# Altium PCB smart-watch.PcbDoc (part 1 of 2)
Units mm, origin at the board's own origin, x right, y up, seen from the top; angles counter-clockwise.
Board outline 30.1 x 34.67 mm, 2 copper layers (Top Layer, Bottom Layer); 78 components, 120 nets, 977 pads, 0 vias.
Unrouted connection lines stored in the file: 551.
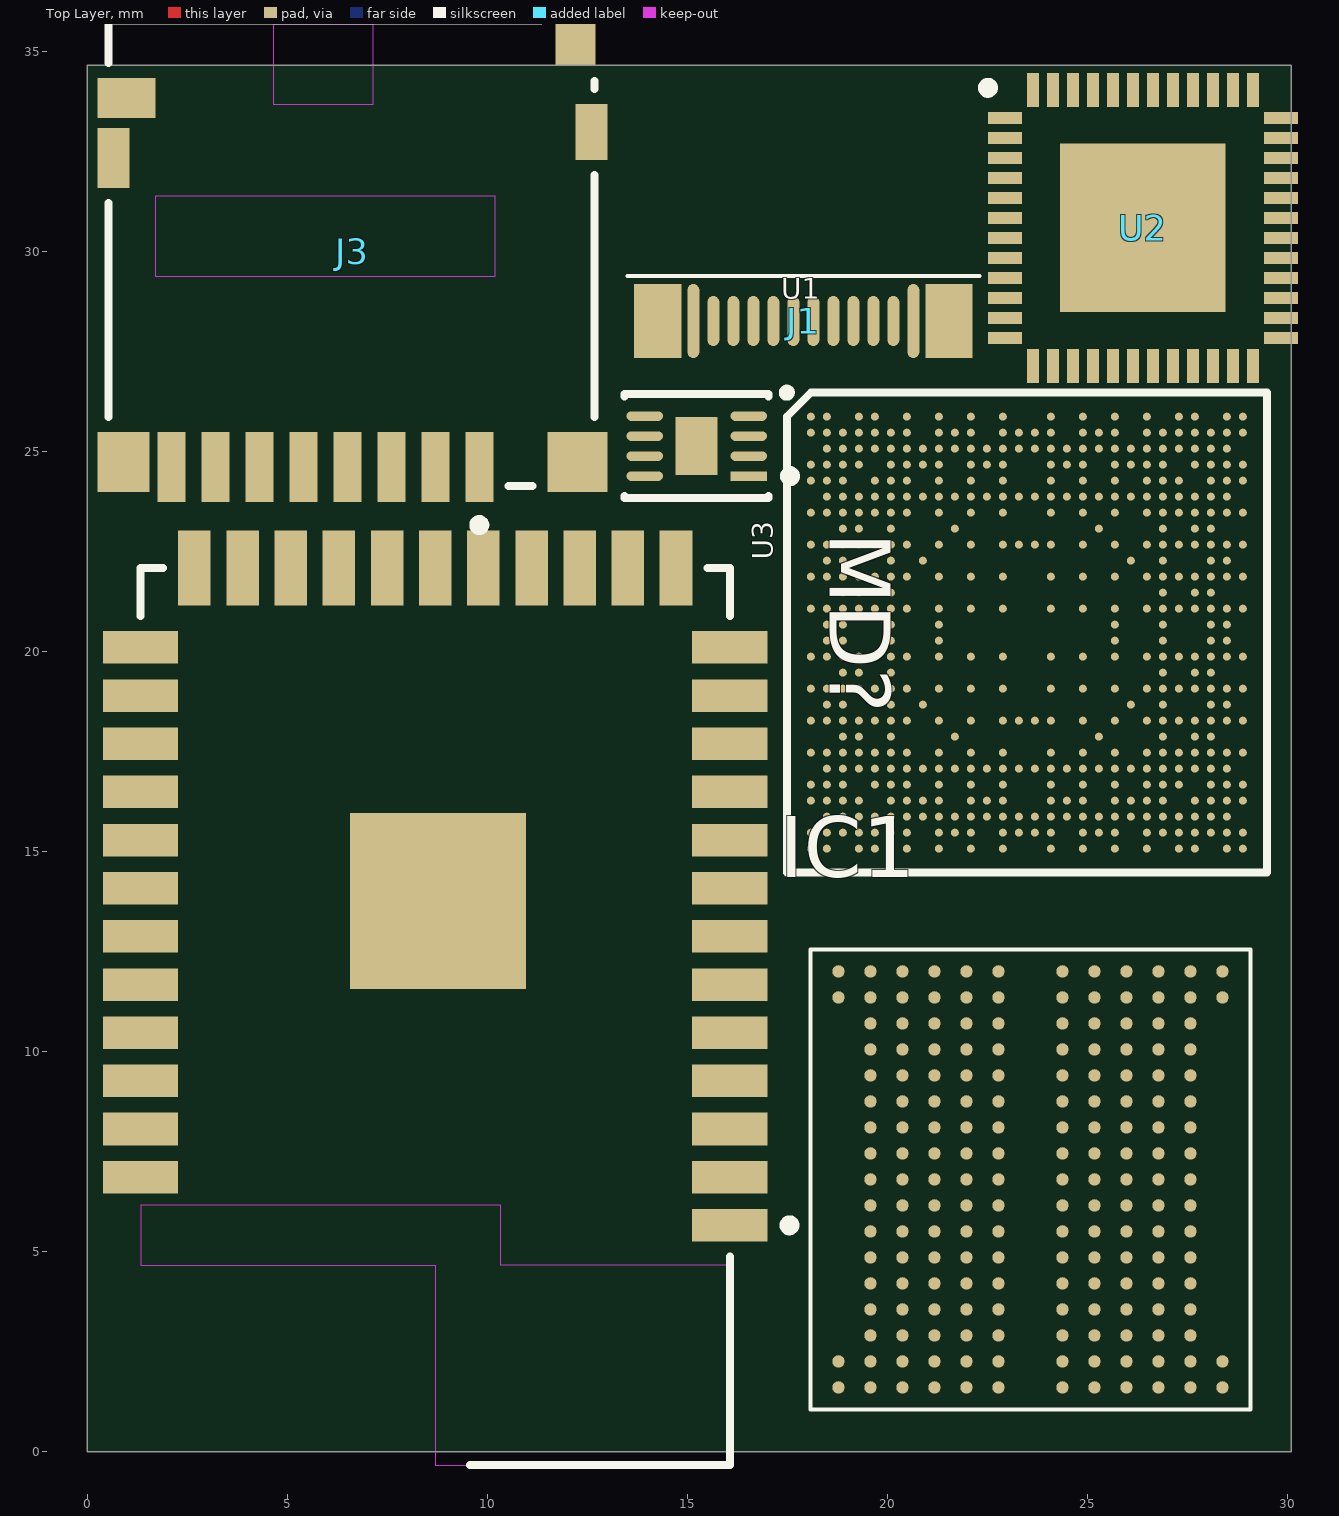
[diagram p0: Top Layer view]
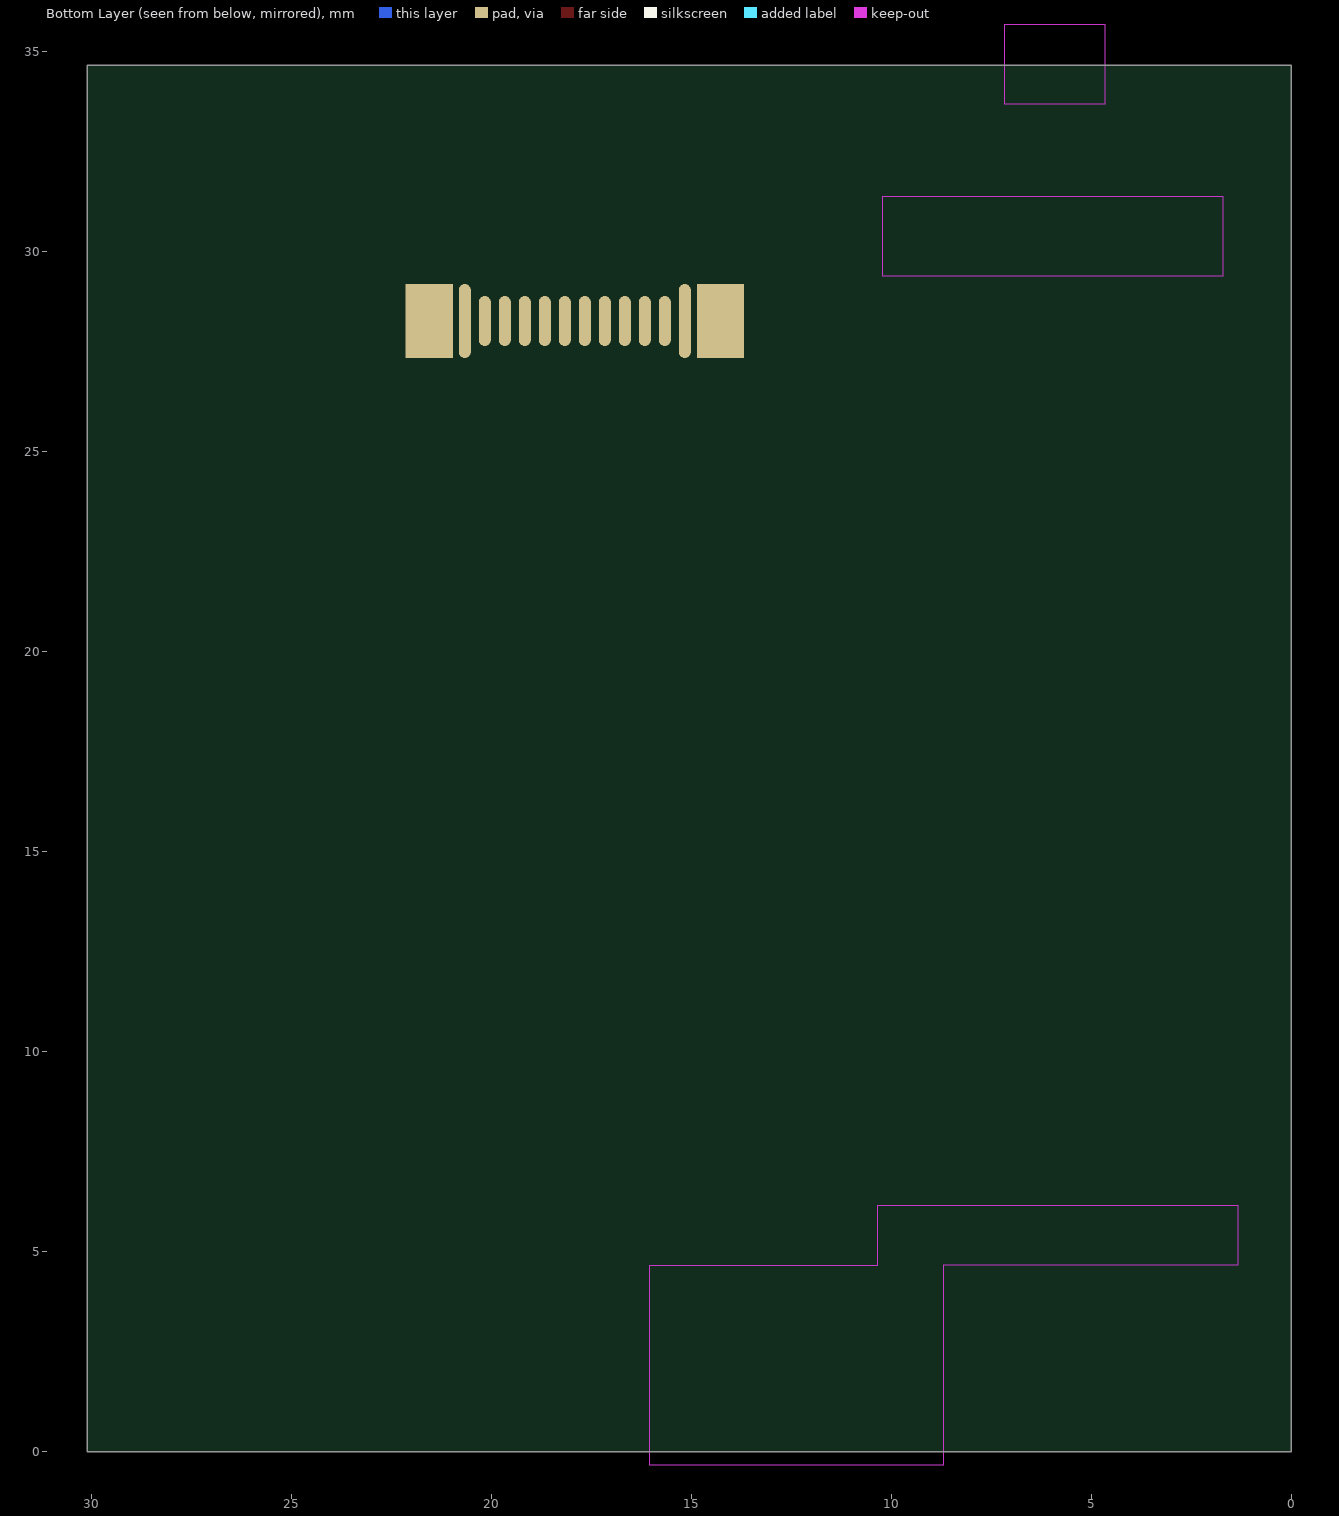
[diagram p1: Bottom Layer view, seen from below]

## Layer stack, top to bottom
Top Solder: solder mask 0.0102, Solder Resist, Dk 3.5
Top Layer: signal copper 0.0356
Dielectric 1: dielectric 0.32, FR-4, Dk 4.8
Bottom Layer: signal copper 0.0356
Bottom Solder: solder mask 0.0102, Solder Resist, Dk 3.5

## Board outline
0,0 30.099,0 30.099,34.671 0,34.671

## Design rules (kind name [scope] priority, off if disabled: settings)
Clearance [All] p1: gap=0.254 ignorepadtopadclearanceinfootprint=FALSE except(0: Arc-Hole Track-Hole SMDPad-Hole THPad-Hole Via-Hole Fill-Hole Poly-Hole Region-Hole Text-Hole)
DiffPairsRouting [All] p1: maxlimit=0.254 minlimit=0.254 mostfreqgap=0.254 toplayer_minwidth=0.381 toplayer_maxwidth=0.381 toplayer_prefwidth=0.381 bottomlayer_minwidth=0.381 bottomlayer_maxwidth=0.381 bottomlayer_prefwidth=0.381 maxuncoupledlength=12.7
PolygonConnect [All] p1: connectstyle=Relief reliefconductorwidth=0.254 reliefentries=4 polygonreliefangle="90 Angle" airgapwidth=0.254
RoutingVias [All] p1: holewidth=0.711 width=1.27 viastyle="Through Hole" minholewidth=0.711 minwidth=1.27 maxholewidth=0.711 maxwidth=1.27
SolderMaskExpansion [All] p1: expansion=0.102 istentingtop=FALSE
Width [All] p1: maxlimit=0.254 minlimit=0.254 preferedwidth=0.254
29 further rules are at their usual default settings.

## Classes and differential pairs
component class U_mcu: C33 C34 C35 C36 C37 C38 C39 C40 C41 C42 C43 C44 C45 C46 C47 C48 C49 C50 C51 C52 C53 C54 IC1 J2 J3 MD? R5 R6 R7 R8 R9 R10 R11 U1
component class U_power: C1 C2 C3 C4 C5 C6 C7 C8 C9 C10 C11 C12 C13 C14 C15 C16 C17 C18 C19 C20 C21 C22 C23 C24 C25 C26 C27 C28 C29 C30 C31 C32 D1 J1 L2 L3 L4 P1 R1 R2 R3 R4 U2 U3
differential pair DRAM_SDQS3: +DRAM_SDQS3_P -DRAM_SDQS3_N
differential pair DRAM_SDQS2: +DRAM_SDQS2_P -DRAM_SDQS2_N
differential pair DRAM_SDQS1: +DRAM_SDQS1_P -DRAM_SDQS1_N
differential pair DRAM_SDQS0: +DRAM_SDQS0_P -DRAM_SDQS0_N
differential pair DRAM_SDCLK0: +DRAM_SDCLK0_P -DRAM_SDCLK0_N
differential pair MIPI_D0: +MIPI_D0_P -MIPI_D0_N
differential pair MIPI_CLK: +MIPI_CLK_P -MIPI_CLK_N

## Components (designator, comment, footprint, x,y, rotation, side; value= is the part's Value field where it differs from the comment)
C1 "47 µF" "CAP 0603_1608" 223.266,12.7 r0 top
C2 "47 µF" "CAP 0603_1608" 218.948,12.7 r0 top
C3 "0.22 µF" "CAP 0603_1608" 161.798,12.7 r0 top
C4 "0.47 µF" "CAP 0603_1608" 157.48,12.7 r0 top
C5 "2.2 µF" "CAP 0603_1608" 137.668,12.7 r0 top
C6 "0.47 µF" "CAP 0603_1608" 133.35,12.7 r0 top
C7 "4.7 µF" "CAP 0603_1608" 95.504,12.7 r0 top
C8 "0.1µF" "CAP 0603_1608" 99.822,12.7 r0 top
C9 "4.7 µF" "CAP 0603_1608" 104.14,12.7 r0 top
C10 "0.1µF" "CAP 0603_1608" 107.823,12.065 r90 top
C11 "4.7 µF" "CAP 0603_1608" 114.046,12.7 r0 top
C12 "0.1µF" "CAP 0603_1608" 118.491,12.065 r90 top
C13 "0.1 µF" "CAP 0603_1608" 212.725,12.065 r90 top
C14 "4.7 µF" "CAP 0603_1608" 185.928,12.065 r90 top
C15 "4.7 µF" "CAP 0603_1608" 191.516,12.065 r90 top
C16 "4.7 µF" "CAP 0603_1608" 197.104,12.065 r90 top
C17 "4.7 µF" "CAP 0603_1608" 202.692,12.065 r90 top
C18 "1 µF" "CAP 0603_1608" 180.34,12.065 r90 top
C19 "1 µF" "CAP 0603_1608" 174.752,12.065 r90 top
C20 "0.22 µF" "CAP 0603_1608" 226.822,12.065 r90 top
C21 "CC0603KRX5R6BB106" "CAP 0603_1608" 166.116,12.7 r0 top
C22 "1 µF" "CAP 0603_1608" 96.901,47.498 r90 top
C23 "1 µF" "CAP 0603_1608" 78.613,12.065 r90 top
C24 "22 µF" "CAP 0603_1608" 61.849,47.498 r90 top
C25 "22 µF" "CAP 0603_1608" 67.691,47.498 r90 top
C26 "22 µF" "CAP 0603_1608" 73.533,47.498 r90 top
C27 "22 µF" "CAP 0603_1608" 79.375,47.498 r90 top
C28 "22 µF" "CAP 0603_1608" 85.217,47.498 r90 top
C29 "22 µF" "CAP 0603_1608" 91.059,47.498 r90 top
C30 "1 µF" "CAP 0603_1608" 56.007,47.498 r90 top
C31 "1 µF" "CAP 0603_1608" 146.304,12.7 r0 top
C32 "2.2 µF" "CAP 0603_1608" 151.003,12.065 r90 top
C33 "0.22 µF" "CAP 0603_1608" 68.834,59.182 r0 top
C34 "22 µF" "CAP 0603_1608" 87.503,42.926 r0 top
C35 "0.22 µF" "CAP 0603_1608" 91.821,42.926 r0 top
C36 "22 µF" "CAP 0603_1608" 96.139,42.926 r0 top
C37 "0.22 µF" "CAP 0603_1608" 76.327,7.493 r0 top
C38 "22 µF" "CAP 0603_1608" 80.645,7.493 r0 top
C39 "0.22 µF" "CAP 0603_1608" 61.595,42.926 r0 top
C40 "0.22 µF" "CAP 0603_1608" 65.913,42.926 r0 top
C41 "0.22 µF" "CAP 0603_1608" 70.231,42.926 r0 top
C42 "0.22 µF" "CAP 0603_1608" 74.549,42.926 r0 top
C43 "0.22 µF" "CAP 0603_1608" 78.867,42.926 r0 top
C44 "0.22 µF" "CAP 0603_1608" 83.185,42.926 r0 top
C45 "0.22 µF" "CAP 0603_1608" 72.644,37.211 r90 top
C46 "0.22 µF" "CAP 0603_1608" 78.486,37.211 r90 top
C47 "0.22 µF" "CAP 0603_1608" 84.328,37.211 r90 top
C48 "0.22 µF" "CAP 0603_1608" 97.282,23.876 r90 top
C49 "22 µF" "CAP 0603_1608" 103.124,23.876 r90 top
C50 "0.22 µF" "CAP 0603_1608" 108.966,23.876 r90 top
C51 "22 µF" "CAP 0603_1608" 115.443,24.511 r0 top
C52 "0.22 µF" "CAP 0603_1608" 66.04,59.309 r90 top
C53 "22 µF" "CAP 0603_1608" 71.882,59.309 r90 top
C54 "0.1µF" "CAP 0603_1608" 120.142,23.876 r90 top
D1 "NSR1020MW2T1G" ONSC-SOD-323-2-477-02_V 209.042,12.319 r0 top
IC1 "W63CH2MBVACE" W63CH2MBVACE 23.584,6.813 r0 top
J1 "CX60-24S-UNIT" "HIROSE CX60-24S-UNIT" 17.907,33.274 r0 top
J2 "AXG830044" AXG830044 44.692,37.984 r90 top
J3 "DM3D-SF" FP-DM3D-SF-MFG 6.604,29.972 r0 top
L2 "1.5 µH" "IND 0806_2016" 129.032,12.319 r0 top
L3 "1.5 µH" "IND 0806_2016" 124.714,12.319 r0 top
L4 "1.5 µH" "IND 0806_2016" 52.324,47.752 r0 top
MD? "ATWINC3400-MR210CA122" FP-ATWINC3400-MR210CA122-MFG 8.702,10.884 r270 top
P1 "Header 2" HDR1X2 35.433,10.287 r90 top
R1 "100 kOhms" "RES 0603_1608" 171.323,12.7 r0 top
R2 "5.76 kOhms" "RES 0603_1608" 141.859,12.7 r0 top
R3 "5.11 kOhms" "RES 0603_1608" 60.198,43.561 r0 top
R4 "5.11 kOhms" "RES 0603_1608" 55.88,43.561 r0 top
R5 "10 kOhms" "RES 0603_1608" 68.834,37.846 r0 top
R6 "10 kOhms" "RES 0603_1608" 64.516,37.846 r0 top
R7 "10 kOhms" "RES 0603_1608" 60.198,37.846 r0 top
R8 "10 kOhms" "RES 0603_1608" 55.88,37.846 r0 top
R9 "1 kOhms" "RES 0603_1608" 78.232,59.944 r0 top
R10 "1 kOhms" "RES 0603_1608" 60.452,59.436 r90 top
R11 "240 Ohms" "RES 0603_1608" 55.88,59.944 r0 top
U1 "MCIMX7D7DVK10SD" BGA488C40P28X28_1200X1200X110 23.492,20.482 r0 top
U2 "MC34PF3001A2EP" QFN50P700X700X90-49N-D 26.395,30.603 r0 top
U3 "MC34671AEP" FP-SOT1590-2-IPC_C 15.24,25.146 r180 top

## Footprints (in the part's own frame and the unit in brackets; to place one, negate y for a bottom-side part, rotate by r counter-clockwise, add the part's x,y. Pads: shape width x height; smd on the part's side, far side on the other; paste and mask are expansions set on the pad)
AXG830044 [mm]
  rect 0.2x0.5 smd: 1(-2.45,-0.85) 2(-2.45,0.85) 3(-2.1,-0.85) 4(-2.1,0.85) 5(-1.75,-0.85) 6(-1.75,0.85) 7(-1.4,-0.85) 8(-1.4,0.85) 9(-1.05,-0.85) 10(-1.05,0.85) 11(-0.7,-0.85) 12(-0.7,0.85) 13(-0.35,-0.85) 14(-0.35,0.85) 15(0,-0.85) 16(0,0.85) 17(0.35,-0.85) 18(0.35,0.85) 19(0.7,-0.85) 20(0.7,0.85) 21(1.05,-0.85) 22(1.05,0.85) 23(1.4,-0.85) 24(1.4,0.85) 25(1.75,-0.85) 26(1.75,0.85) 27(2.1,-0.85) 28(2.1,0.85) 29(2.45,-0.85) 30(2.45,0.85)
  rect 0.26x0.39 smd: MP1(-3.365,0.545) MP2(-3.365,-0.545) MP3(3.365,0.545) MP4(3.365,-0.545)
  silkscreen extent -3,-0.71 3,0.7, body extent -3.52,-1.08 3.52,1.08, height 0.76
BGA488C40P28X28_1200X1200X110 [mm]
  round 0.2 smd: A1(-5.4,5.4) A2(-5,5.4) A4(-4.2,5.4) A5(-3.8,5.4) A7(-3,5.4) A9(-2.2,5.4) A11(-1.4,5.4) A13(-0.6,5.4) A16(0.6,5.4) A18(1.4,5.4) A20(2.2,5.4) A22(3,5.4) A24(3.8,5.4) A25(4.2,5.4) A27(5,5.4) A28(5.4,5.4) AA3(-4.6,-2.6) AA4(-4.2,-2.6) AA6(-3.4,-2.6) AA10(-1.8,-2.6) AA19(1.8,-2.6) AA23(3.4,-2.6) AA25(4.2,-2.6) AA26(4.6,-2.6) AB1(-5.4,-3) AB2(-5,-3) AB3(-4.6,-3) AB4(-4.2,-3) AB5(-3.8,-3) AB6(-3.4,-3) AB7(-3,-3) AB9(-2.2,-3) AB11(-1.4,-3) AB13(-0.6,-3) AB16(0.6,-3) AB18(1.4,-3) AB20(2.2,-3) AB22(3,-3) AB23(3.4,-3) AB24(3.8,-3) AB25(4.2,-3) AB26(4.6,-3) AB27(5,-3) AB28(5.4,-3) AC2(-5,-3.4) AC3(-4.6,-3.4) AC4(-4.2,-3.4) AC5(-3.8,-3.4) AC6(-3.4,-3.4) AC7(-3,-3.4) AC8(-2.6,-3.4) AC9(-2.2,-3.4) AC10(-1.8,-3.4) AC11(-1.4,-3.4) AC12(-1,-3.4) AC13(-0.6,-3.4) AC14(-0.2,-3.4) AC15(0.2,-3.4) AC16(0.6,-3.4) AC17(1,-3.4) AC18(1.4,-3.4) AC19(1.8,-3.4) AC20(2.2,-3.4) AC21(2.6,-3.4) AC22(3,-3.4) AC23(3.4,-3.4) AC24(3.8,-3.4) AC25(4.2,-3.4) AC26(4.6,-3.4) AC27(5,-3.4) AD1(-5.4,-3.8) AD2(-5,-3.8) AD3(-4.6,-3.8) AD5(-3.8,-3.8) AD6(-3.4,-3.8) AD7(-3,-3.8) AD9(-2.2,-3.8) AD11(-1.4,-3.8) AD13(-0.6,-3.8) AD16(0.6,-3.8) AD18(1.4,-3.8) AD20(2.2,-3.8) AD22(3,-3.8) AD23(3.4,-3.8) AD24(3.8,-3.8) AD26(4.6,-3.8) AD27(5,-3.8) AD28(5.4,-3.8) AE1(-5.4,-4.2) AE2(-5,-4.2) AE3(-4.6,-4.2) AE4(-4.2,-4.2) AE6(-3.4,-4.2) AE7(-3,-4.2) AE8(-2.6,-4.2) AE9(-2.2,-4.2) AE11(-1.4,-4.2) AE12(-1,-4.2) AE13(-0.6,-4.2) AE16(0.6,-4.2) AE17(1,-4.2) AE18(1.4,-4.2) AE20(2.2,-4.2) AE21(2.6,-4.2) AE22(3,-4.2) AE23(3.4,-4.2) AE25(4.2,-4.2) AE26(4.6,-4.2) AE27(5,-4.2) AE28(5.4,-4.2) AF2(-5,-4.6) AF3(-4.6,-4.6) AF4(-4.2,-4.6) AF5(-3.8,-4.6) AF6(-3.4,-4.6) AF7(-3,-4.6) AF8(-2.6,-4.6) AF9(-2.2,-4.6) AF10(-1.8,-4.6) AF11(-1.4,-4.6) AF12(-1,-4.6) AF13(-0.6,-4.6) AF14(-0.2,-4.6) AF15(0.2,-4.6) AF16(0.6,-4.6) AF17(1,-4.6) AF18(1.4,-4.6) AF19(1.8,-4.6) AF20(2.2,-4.6) AF21(2.6,-4.6) AF22(3,-4.6) AF23(3.4,-4.6) AF24(3.8,-4.6) AF25(4.2,-4.6) AF26(4.6,-4.6) AF27(5,-4.6) AG1(-5.4,-5) AG2(-5,-5) AG3(-4.6,-5) AG4(-4.2,-5) AG5(-3.8,-5) AG6(-3.4,-5) AG7(-3,-5) AG9(-2.2,-5) AG10(-1.8,-5) AG11(-1.4,-5) AG13(-0.6,-5) AG14(-0.2,-5) AG15(0.2,-5) AG16(0.6,-5) AG18(1.4,-5) AG19(1.8,-5) AG20(2.2,-5) AG22(3,-5) AG23(3.4,-5) AG24(3.8,-5) AG25(4.2,-5) AG26(4.6,-5) AG27(5,-5) AG28(5.4,-5) AH1(-5.4,-5.4) AH2(-5,-5.4) AH4(-4.2,-5.4) AH5(-3.8,-5.4) AH7(-3,-5.4) AH9(-2.2,-5.4) AH11(-1.4,-5.4) AH13(-0.6,-5.4) AH16(0.6,-5.4) AH18(1.4,-5.4) AH20(2.2,-5.4) AH22(3,-5.4) AH24(3.8,-5.4) AH25(4.2,-5.4) AH27(5,-5.4) AH28(5.4,-5.4) B1(-5.4,5) B2(-5,5) B3(-4.6,5) B4(-4.2,5) B5(-3.8,5) B6(-3.4,5) B7(-3,5) B9(-2.2,5) B10(-1.8,5) B11(-1.4,5) B13(-0.6,5) B14(-0.2,5) B15(0.2,5) B16(0.6,5) B18(1.4,5) B19(1.8,5) B20(2.2,5) B22(3,5) B23(3.4,5) B24(3.8,5) B25(4.2,5) B26(4.6,5) B27(5,5) B28(5.4,5) C2(-5,4.6) C3(-4.6,4.6) C4(-4.2,4.6) C5(-3.8,4.6) C6(-3.4,4.6) C7(-3,4.6) C8(-2.6,4.6) C9(-2.2,4.6) C10(-1.8,4.6) C11(-1.4,4.6) C12(-1,4.6) C13(-0.6,4.6) C14(-0.2,4.6) C15(0.2,4.6) C16(0.6,4.6) C17(1,4.6) C18(1.4,4.6) C19(1.8,4.6) C20(2.2,4.6) C21(2.6,4.6) C22(3,4.6) C23(3.4,4.6) C24(3.8,4.6) C25(4.2,4.6) C26(4.6,4.6) C27(5,4.6) D1(-5.4,4.2) D2(-5,4.2) D3(-4.6,4.2) D4(-4.2,4.2) D6(-3.4,4.2) D7(-3,4.2) D8(-2.6,4.2) D9(-2.2,4.2) D11(-1.4,4.2) D12(-1,4.2) D13(-0.6,4.2) D16(0.6,4.2) D17(1,4.2) D18(1.4,4.2) D20(2.2,4.2) D21(2.6,4.2) D22(3,4.2) D23(3.4,4.2) D25(4.2,4.2) D26(4.6,4.2) D27(5,4.2) D28(5.4,4.2) E1(-5.4,3.8) E2(-5,3.8) E3(-4.6,3.8) E5(-3.8,3.8) E6(-3.4,3.8) E7(-3,3.8) E9(-2.2,3.8) E11(-1.4,3.8) E13(-0.6,3.8) E16(0.6,3.8) E18(1.4,3.8) E20(2.2,3.8) E22(3,3.8) E23(3.4,3.8) E24(3.8,3.8) E26(4.6,3.8) E27(5,3.8) E28(5.4,3.8) F2(-5,3.4) F3(-4.6,3.4) F4(-4.2,3.4) F5(-3.8,3.4) F6(-3.4,3.4) F7(-3,3.4) F8(-2.6,3.4) F9(-2.2,3.4) F10(-1.8,3.4) F11(-1.4,3.4) F12(-1,3.4) F13(-0.6,3.4) F14(-0.2,3.4) F15(0.2,3.4) F16(0.6,3.4) F17(1,3.4) F18(1.4,3.4) F19(1.8,3.4) F20(2.2,3.4) F21(2.6,3.4) F22(3,3.4) F23(3.4,3.4) F24(3.8,3.4) F25(4.2,3.4) F26(4.6,3.4) F27(5,3.4) G1(-5.4,3) G2(-5,3) G3(-4.6,3) G4(-4.2,3) G5(-3.8,3) G6(-3.4,3) G7(-3,3) G9(-2.2,3) G11(-1.4,3) G13(-0.6,3) G16(0.6,3) G18(1.4,3) G20(2.2,3) G22(3,3) G23(3.4,3) G24(3.8,3) G25(4.2,3) G26(4.6,3) G27(5,3) G28(5.4,3) H3(-4.6,2.6) H4(-4.2,2.6) H6(-3.4,2.6) H10(-1.8,2.6) H19(1.8,2.6) H23(3.4,2.6) H25(4.2,2.6) H26(4.6,2.6) J1(-5.4,2.2) J2(-5,2.2) J3(-4.6,2.2) J4(-4.2,2.2) J5(-3.8,2.2) J6(-3.4,2.2) J7(-3,2.2) J9(-2.2,2.2) J11(-1.4,2.2) J13(-0.6,2.2) J14(-0.2,2.2) J15(0.2,2.2) J16(0.6,2.2) J18(1.4,2.2) J20(2.2,2.2) J22(3,2.2) J23(3.4,2.2) J24(3.8,2.2) J25(4.2,2.2) J26(4.6,2.2) J27(5,2.2) J28(5.4,2.2) K2(-5,1.8) K3(-4.6,1.8) K6(-3.4,1.8) K8(-2.6,1.8) K21(2.6,1.8) K23(3.4,1.8) K26(4.6,1.8) K27(5,1.8) L1(-5.4,1.4) L2(-5,1.4) L3(-4.6,1.4) L4(-4.2,1.4) L5(-3.8,1.4) L6(-3.4,1.4) L7(-3,1.4) L9(-2.2,1.4) L11(-1.4,1.4) L13(-0.6,1.4) L16(0.6,1.4) L18(1.4,1.4) L20(2.2,1.4) L22(3,1.4) L23(3.4,1.4) L24(3.8,1.4) L25(4.2,1.4) L26(4.6,1.4) L27(5,1.4) L28(5.4,1.4) M3(-4.6,1) M4(-4.2,1) M6(-3.4,1) M23(3.4,1) M25(4.2,1) M26(4.6,1) N1(-5.4,0.6) N2(-5,0.6) N3(-4.6,0.6) N4(-4.2,0.6) N5(-3.8,0.6) N6(-3.4,0.6) N7(-3,0.6) N9(-2.2,0.6) N11(-1.4,0.6) N13(-0.6,0.6) N16(0.6,0.6) N18(1.4,0.6) N20(2.2,0.6) N22(3,0.6) N23(3.4,0.6) N24(3.8,0.6) N25(4.2,0.6) N26(4.6,0.6) N27(5,0.6) N28(5.4,0.6) P2(-5,0.2) P3(-4.6,0.2) P6(-3.4,0.2) P9(-2.2,0.2) P20(2.2,0.2) P23(3.4,0.2) P26(4.6,0.2) P27(5,0.2) R2(-5,-0.2) R3(-4.6,-0.2) R6(-3.4,-0.2) R9(-2.2,-0.2) R20(2.2,-0.2) R23(3.4,-0.2) R26(4.6,-0.2) R27(5,-0.2) T1(-5.4,-0.6) T2(-5,-0.6) T3(-4.6,-0.6) T4(-4.2,-0.6) T5(-3.8,-0.6) T6(-3.4,-0.6) T7(-3,-0.6) T9(-2.2,-0.6) T11(-1.4,-0.6) T13(-0.6,-0.6) T16(0.6,-0.6) T18(1.4,-0.6) T20(2.2,-0.6) T22(3,-0.6) T23(3.4,-0.6) T24(3.8,-0.6) T25(4.2,-0.6) T26(4.6,-0.6) T27(5,-0.6) T28(5.4,-0.6) U3(-4.6,-1) U4(-4.2,-1) U6(-3.4,-1) U23(3.4,-1) U25(4.2,-1) U26(4.6,-1) V1(-5.4,-1.4) V2(-5,-1.4) V3(-4.6,-1.4) V4(-4.2,-1.4) V5(-3.8,-1.4) V6(-3.4,-1.4) V7(-3,-1.4) V9(-2.2,-1.4) V11(-1.4,-1.4) V13(-0.6,-1.4) V16(0.6,-1.4) V18(1.4,-1.4) V20(2.2,-1.4) V22(3,-1.4) V23(3.4,-1.4) V24(3.8,-1.4) V25(4.2,-1.4) V26(4.6,-1.4) V27(5,-1.4) V28(5.4,-1.4) W2(-5,-1.8) W3(-4.6,-1.8) W6(-3.4,-1.8) W8(-2.6,-1.8) W21(2.6,-1.8) W23(3.4,-1.8) W26(4.6,-1.8) W27(5,-1.8) Y1(-5.4,-2.2) Y2(-5,-2.2) Y3(-4.6,-2.2) Y4(-4.2,-2.2) Y5(-3.8,-2.2) Y6(-3.4,-2.2) Y7(-3,-2.2) Y9(-2.2,-2.2) Y11(-1.4,-2.2) Y13(-0.6,-2.2) Y14(-0.2,-2.2) Y15(0.2,-2.2) Y16(0.6,-2.2) Y18(1.4,-2.2) Y20(2.2,-2.2) Y22(3,-2.2) Y23(3.4,-2.2) Y24(3.8,-2.2) Y25(4.2,-2.2) Y26(4.6,-2.2) Y27(5,-2.2) Y28(5.4,-2.2)
  silkscreen extent -6.1,-6 6,6.1, body extent -6,-6 6,6, height 1.1
"CAP 0603_1608" [mm] "Chip Capacitor, 2-Leads, Body 1.60x0.80mm, IPC Medium Density"
  rect 0.9x1 smd: 1(-0.675,0) 2(0.675,0)
  silkscreen extent -1.4,-0.7 1.4,0.7, body extent -0.8,-0.41 0.8,0.41, height 0.82
FP-ATWINC3400-MR210CA122-MFG [mm]
  rect 0.813x1.88 smd paste+0 mask+0: 1(5.218,7.366) 2(4.014,7.366) 3(2.81,7.366) 4(1.606,7.366) 5(0.402,7.366) 6(-0.802,7.366) 7(-2.006,7.366) 8(-3.21,7.366) 9(-4.414,7.366) 10(-5.618,7.366) 11(-6.822,7.366) 12(-8.026,7.366) 13(-9.23,7.366) 25(-9.23,-7.366) 26(-8.026,-7.366) 27(-6.822,-7.366) 28(-5.618,-7.366) 29(-4.414,-7.366) 30(-3.21,-7.366) 31(-2.006,-7.366) 32(-0.802,-7.366) 33(0.402,-7.366) 34(1.606,-7.366) 35(2.81,-7.366) 36(4.014,-7.366)
  rect 1.88x0.813 smd paste+0 mask+0: 14(-11.214,6.02) 15(-11.214,4.816) 16(-11.214,3.612) 17(-11.214,2.408) 18(-11.214,1.204) 19(-11.214,0) 20(-11.214,-1.204) 21(-11.214,-2.408) 22(-11.214,-3.612) 23(-11.214,-4.816) 24(-11.214,-6.02)
  rect 4.4x4.4 smd paste+0 mask+0: 37(-2.886,0.065)
  Keep-Out Layer region: 11.214,7.336 6.214,7.336 6.214,1.634 4.714,1.634 4.714,-7.366 6.214,-7.366 6.214,0 11.214,0
  Keep-Out Layer region: 11.214,7.336 6.214,7.336 6.214,1.634 4.714,1.634 4.714,-7.366 6.214,-7.366 6.214,0 11.214,0
  silkscreen extent -11.21,-7.37 11.21,8.98, body extent -12.25,-14.47 11.31,8.41, height 0.25
FP-DM3D-SF-MFG [mm]
  rect 0.7x1.75 smd paste+0 mask+0: 1(3.2,-5.35) 2(2.1,-5.35) 3(1,-5.35) 4(-0.1,-5.35) 5(-1.2,-5.35) 6(-2.3,-5.35) 7(-3.4,-5.35) 8(-4.5,-5.35)
  rect 1x1.55 smd paste+0 mask+0: 9(5.6,5.45)
  rect 1.45x1 smd paste+0 mask+0: 10(-5.625,3.875)
  rect 0.8x1.4 smd paste+0 mask+0: 11(6,3.025)
  rect 0.8x1.5 smd paste+0 mask+0: 12(-5.95,2.375)
  rect 1.3x1.5 smd paste+0 mask+0: 13(-5.7,-5.225)
  rect 1.5x1.5 smd paste+0 mask+0: 14(5.65,-5.225)
  Keep-Out Layer region: -1.95,3.725 0.55,3.725 0.55,5.725 -1.95,5.725
  Keep-Out Layer region: -4.9,-0.575 3.6,-0.575 3.6,1.425 -4.9,1.425
  silkscreen extent -6.07,-6.92 6.07,5.82, body extent -6.45,-6.32 6.5,6.32, height 0.25
FP-SOT1590-2-IPC_C [mm]
  rect 0.911x0.242 smd paste+0 mask+0: 1(-1.301,0.75)
  rrect100% 0.911x0.242 smd paste+0 mask+0: 2(-1.301,0.25) 3(-1.301,-0.25) 4(-1.301,-0.75) 5(1.301,-0.75) 6(1.301,-0.25) 7(1.301,0.25) 8(1.301,0.75)
  rect 1.05x1.45 smd paste-1000 mask+0: 9(0,0)
  silkscreen extent -2.46,-1.3 1.8,1.3, body extent -1.86,-1.1 1.86,1.1, height 0.25
HDR1X2 [mm] "Connector; Header; 2 Position"
  rect 1.5x1.5 hole 0.9: 1(0,0)
  round 1.5 hole 0.9: 2(2.54,0)
  silkscreen extent -1.27,-1.27 3.81,1.27
"HIROSE CX60-24S-UNIT" [mm]
  oval 0.3x1.85 smd: A1(2.75,-5) A12(-2.75,-5)
  oval 0.3x1.25 smd: A2(2.25,-5) A3(1.75,-5) A4(1.25,-5) A5(0.75,-5) A6(0.25,-5) A7(-0.25,-5) A8(-0.75,-5) A9(-1.25,-5) A10(-1.75,-5) A11(-2.25,-5)
  oval 0.3x1.85 smd far side: B1(-2.75,-5) B12(2.75,-5)
  oval 0.3x1.25 smd far side: B2(-2.25,-5) B3(-1.75,-5) B4(-1.25,-5) B5(-0.75,-5) B6(-0.25,-5) B7(0.25,-5) B8(0.75,-5) B9(1.25,-5) B10(1.75,-5) B11(2.25,-5)
  rect 1.18x1.85 smd: S(-3.64,-5) S(3.64,-5)
  rect 1.18x1.85 smd far side: S(-3.64,-5) S(3.64,-5)
  silkscreen extent -4.4,-3.88 4.4,-3.88, body extent -4.11,-5.55 4.14,5.55, height 0.86
"IND 0806_2016" [mm] "Chip Capacitor, 2-Leads, Body 2.00x1.20mm, IPC Medium Density"
  rect 0.6x1.8 smd: 1(-0.8,0) 2(0.8,0)
  silkscreen extent -1.3,-1.1 1.3,1.1, body extent -1.01,-0.91 1.01,0.91, height 1.81
ONSC-SOD-323-2-477-02_V [mm] "SOD, 2-Leads, Body 1.7x1.25mm"
  rect 0.63x0.83 smd: 1(-1.115,0) 2(1.115,0)
  silkscreen extent -1.24,-0.67 0.4,1.09, body extent -0.85,-0.63 0.85,0.63, height 1.06
QFN50P700X700X90-49N-D [mm]
  rect 0.85x0.3 smd: 1(-3.45,2.75) 2(-3.45,2.25) 3(-3.45,1.75) 4(-3.45,1.25) 5(-3.45,0.75) 6(-3.45,0.25) 7(-3.45,-0.25) 8(-3.45,-0.75) 9(-3.45,-1.25) 10(-3.45,-1.75) 11(-3.45,-2.25) 12(-3.45,-2.75) 25(3.45,-2.75) 26(3.45,-2.25) 27(3.45,-1.75) 28(3.45,-1.25) 29(3.45,-0.75) 30(3.45,-0.25) 31(3.45,0.25) 32(3.45,0.75) 33(3.45,1.25) 34(3.45,1.75) 35(3.45,2.25) 36(3.45,2.75)
  rect 0.3x0.85 smd: 13(-2.75,-3.45) 14(-2.25,-3.45) 15(-1.75,-3.45) 16(-1.25,-3.45) 17(-0.75,-3.45) 18(-0.25,-3.45) 19(0.25,-3.45) 20(0.75,-3.45) 21(1.25,-3.45) 22(1.75,-3.45) 23(2.25,-3.45) 24(2.75,-3.45) 37(2.75,3.45) 38(2.25,3.45) 39(1.75,3.45) 40(1.25,3.45) 41(0.75,3.45) 42(0.25,3.45) 43(-0.25,3.45) 44(-0.75,3.45) 45(-1.25,3.45) 46(-1.75,3.45) 47(-2.25,3.45) 48(-2.75,3.45)
  rect 4.14x4.22 smd: 49(0,0)
  silkscreen extent -4,3.38 -3.75,3.62, body extent -3.55,-3.55 3.55,3.55, height 0.9
"RES 0603_1608" [mm] "Chip Resistor, 2-Leads, Body 1.60x0.80mm, IPC Medium Density"
  rect 0.85x0.95 smd: 1(-0.65,0) 2(0.65,0)
  silkscreen extent -1.27,-0.7 1.27,0.7, body extent -0.8,-0.4 0.8,0.4, height 0.45
W63CH2MBVACE [mm]
  round 0.31 smd: A1(-4.8,5.2) A2(-4,5.2) A3(-3.2,5.2) A4(-2.4,5.2) A5(-1.6,5.2) A6(-0.8,5.2) A8(0.8,5.2) A9(1.6,5.2) A10(2.4,5.2) A11(3.2,5.2) A12(4,5.2) A13(4.8,5.2) B1(-4.8,4.55) B2(-4,4.55) B3(-3.2,4.55) B4(-2.4,4.55) B5(-1.6,4.55) B6(-0.8,4.55) B8(0.8,4.55) B9(1.6,4.55) B10(2.4,4.55) B11(3.2,4.55) B12(4,4.55) B13(4.8,4.55) C2(-4,3.9) C3(-3.2,3.9) C4(-2.4,3.9) C5(-1.6,3.9) C6(-0.8,3.9) C8(0.8,3.9) C9(1.6,3.9) C10(2.4,3.9) C11(3.2,3.9) C12(4,3.9) D2(-4,3.25) D3(-3.2,3.25) D4(-2.4,3.25) D5(-1.6,3.25) D6(-0.8,3.25) D8(0.8,3.25) D9(1.6,3.25) D10(2.4,3.25) D11(3.2,3.25) D12(4,3.25) E2(-4,2.6) E3(-3.2,2.6) E4(-2.4,2.6) E5(-1.6,2.6) E6(-0.8,2.6) E8(0.8,2.6) E9(1.6,2.6) E10(2.4,2.6) E11(3.2,2.6) E12(4,2.6) F2(-4,1.95) F3(-3.2,1.95) F4(-2.4,1.95) F5(-1.6,1.95) F6(-0.8,1.95) F8(0.8,1.95) F9(1.6,1.95) F10(2.4,1.95) F11(3.2,1.95) F12(4,1.95) G2(-4,1.3) G3(-3.2,1.3) G4(-2.4,1.3) G5(-1.6,1.3) G6(-0.8,1.3) G8(0.8,1.3) G9(1.6,1.3) G10(2.4,1.3) G11(3.2,1.3) G12(4,1.3) H2(-4,0.65) H3(-3.2,0.65) H4(-2.4,0.65) H5(-1.6,0.65) H6(-0.8,0.65) H8(0.8,0.65) H9(1.6,0.65) H10(2.4,0.65) H11(3.2,0.65) H12(4,0.65) J2(-4,0) J3(-3.2,0) J4(-2.4,0) J5(-1.6,0) J6(-0.8,0) J8(0.8,0) J9(1.6,0) J10(2.4,0) J11(3.2,0) J12(4,0) K2(-4,-0.65) K3(-3.2,-0.65) K4(-2.4,-0.65) K5(-1.6,-0.65) K6(-0.8,-0.65) K8(0.8,-0.65) K9(1.6,-0.65) K10(2.4,-0.65) K11(3.2,-0.65) K12(4,-0.65) L2(-4,-1.3) L3(-3.2,-1.3) L4(-2.4,-1.3) L5(-1.6,-1.3) L6(-0.8,-1.3) L8(0.8,-1.3) L9(1.6,-1.3) L10(2.4,-1.3) L11(3.2,-1.3) L12(4,-1.3) M2(-4,-1.95) M3(-3.2,-1.95) M4(-2.4,-1.95) M5(-1.6,-1.95) M6(-0.8,-1.95) M8(0.8,-1.95) M9(1.6,-1.95) M10(2.4,-1.95) M11(3.2,-1.95) M12(4,-1.95) N2(-4,-2.6) N3(-3.2,-2.6) N4(-2.4,-2.6) N5(-1.6,-2.6) N6(-0.8,-2.6) N8(0.8,-2.6) N9(1.6,-2.6) N10(2.4,-2.6) N11(3.2,-2.6) N12(4,-2.6) P2(-4,-3.25) P3(-3.2,-3.25) P4(-2.4,-3.25) P5(-1.6,-3.25) P6(-0.8,-3.25) P8(0.8,-3.25) P9(1.6,-3.25) P10(2.4,-3.25) P11(3.2,-3.25) P12(4,-3.25) R2(-4,-3.9) R3(-3.2,-3.9) R4(-2.4,-3.9) R5(-1.6,-3.9) R6(-0.8,-3.9) R8(0.8,-3.9) R9(1.6,-3.9) R10(2.4,-3.9) R11(3.2,-3.9) R12(4,-3.9) T1(-4.8,-4.55) T2(-4,-4.55) T3(-3.2,-4.55) T4(-2.4,-4.55) T5(-1.6,-4.55) T6(-0.8,-4.55) T8(0.8,-4.55) T9(1.6,-4.55) T10(2.4,-4.55) T11(3.2,-4.55) T12(4,-4.55) T13(4.8,-4.55) U1(-4.8,-5.2) U2(-4,-5.2) U3(-3.2,-5.2) U4(-2.4,-5.2) U5(-1.6,-5.2) U6(-0.8,-5.2) U8(0.8,-5.2) U9(1.6,-5.2) U10(2.4,-5.2) U11(3.2,-5.2) U12(4,-5.2) U13(4.8,-5.2)
  silkscreen extent -5.5,-5.75 5.5,5.75

## Part data
C1 C2: library part GRM188R60G476ME15D, "CAP CER 47UF 4V X5R 0603", Part Number=GRM188R60G476ME15D
C3 C20 C33 C35 C37 C39 C40 C41 C42 C43 C44 C45 C46 C47 C48 C50 C52: library part CC0603ZRY5V9BB224, "CAP CER 0.22UF 50V Y5V 0603", Device Package="0603 (1608 Metric)", manufacturer=Yageo, Operating Temperature="-30°C ~ 85°C", Supplier Part Number 1=311-1830-1-ND, Temperature Coefficient="Y5V (F)", Tolerance="-20%, +80%", Voltage - Rated=50V, Applications="General Purpose", Capacitance="0.22 µF", componentlink1description=Datasheet, componentlink1url=http://www.yageo.com/documents/recent/UPY-GPHC_Y5V_6.3V-to-50V_8.pdf, componentlink2description="DigiKey Link", componentlink2url=https://www.digikey.com/en/products/detail/yageo/CC0603ZRY5V9BB224/5195237, lastupdated="2022-05-23 12:54:43 PM", Lifecycle Status=Active, Minimum Order=1, Mounting Type="Surface Mount, MLCC", Package / Case="0603 (1608 Metric)", Packaging=TapeAndReel, Part Number=CC0603ZRY5V9BB224, Part Status=Active, partid=12516, price=0.02, Series=CC, Size / Dimension="0.063\" L x 0.031\" W (1.60mm x 0.80mm)", Supplier 1=DigiKey, Thickness (Max)="0.035\" (0.90mm)"
C4 C6: library part CL10B474KP8NNNC, "CAP CER 0.47UF 10V X7R 0603", Device Package="0603 (1608 Metric)", manufacturer="Samsung Electro-Mechanics", Operating Temperature="-55°C ~ 125°C", Supplier Part Number 1=1276-1247-1-ND, Temperature Coefficient=X7R, Tolerance=±10%, Voltage - Rated=10V, Applications="General Purpose", Capacitance="0.47 µF", componentlink1description=Datasheet, componentlink1url=http://www.samsungsem.com/kr/support/product-search/mlcc/CL10B474KP8NNNC.jsp, componentlink2description="DigiKey Link", componentlink2url=https://www.digikey.com/en/products/detail/samsung-electro-mechanics/CL10B474KP8NNNC/3886905, lastupdated="2022-05-23 12:54:38 PM", Lifecycle Status=Active, Minimum Order=1, Mounting Type="Surface Mount, MLCC", Package / Case="0603 (1608 Metric)", Packaging=TapeAndReel, Part Number=CL10B474KP8NNNC, Part Status=Active, partid=14272, price=0.01, Series=CL, Size / Dimension="0.063\" L x 0.031\" W (1.60mm x 0.80mm)", Supplier 1=DigiKey, Thickness (Max)="0.035\" (0.90mm)"
C5: library part GRM188R71A225KE15D, "CAP CER 2.2UF 10V X7R 0603", Device Package="0603 (1608 Metric)", manufacturer="Murata Electronics", Operating Temperature="-55°C ~ 125°C", Supplier Part Number 1=490-4520-1-ND, Temperature Coefficient=X7R, Tolerance=±10%, Voltage - Rated=10V, Applications="General Purpose", Capacitance="2.2 µF", componentlink1description=Datasheet, componentlink1url=https://www.murata.com/~/media/webrenewal/support/library/catalog/products/capacitor/mlcc/c02e.ashx?la=en-us, componentlink2description="DigiKey Link", componentlink2url=https://www.digikey.com/en/products/detail/murata-electronics/GRM188R71A225KE15D/1033256, lastupdated="2022-05-23 12:55:02 PM", Lifecycle Status=Active, Minimum Order=1, Mounting Type="Surface Mount, MLCC", Package / Case="0603 (1608 Metric)", Packaging=TapeAndReel, Part Number=GRM188R71A225KE15D, Part Status=Active, partid=39582, price=0.02, Series=GRM, Size / Dimension="0.063\" L x 0.031\" W (1.60mm x 0.80mm)", Supplier 1=DigiKey, Thickness (Max)="0.035\" (0.90mm)"
C7 C9 C11 C14 C15 C16 C17: library part LMK107BJ475KAHT, "CAP CER 4.7UF 10V X5R 0603", Device Package="0603 (1608 Metric)", manufacturer="Taiyo Yuden", Operating Temperature="-55°C ~ 85°C", Ratings=AEC-Q200, Supplier Part Number 1=587-3416-1-ND, Temperature Coefficient=X5R, Tolerance=±10%, Voltage - Rated=10V, Applications=Automotive, Capacitance="4.7 µF", componentlink1description=Datasheet, componentlink1url="https://ds.yuden.co.jp/TYCOMPAS/ut/detail?pn=LMK107BJ475KAHT  &u=M", componentlink2description="DigiKey Link", componentlink2url=https://www.digikey.com/en/products/detail/taiyo-yuden/LMK107BJ475KAHT/4157765, lastupdated="2022-05-23 12:54:34 PM", Lifecycle Status=Active, Minimum Order=1, Mounting Type="Surface Mount, MLCC", Package / Case="0603 (1608 Metric)", Packaging=TapeAndReel, Part Number=LMK107BJ475KAHT, Part Status=Active, partid=15336, price=0.02, Series=M, Size / Dimension="0.063\" L x 0.031\" W (1.60mm x 0.80mm)", Supplier 1=DigiKey, Thickness (Max)="0.035\" (0.90mm)"
C8 C10 C12 C54: library part 0603ZC104KAT2A, "CAP CER 0.1UF 10V X7R 0603", Device Package="0603 (1608 Metric)", manufacturer="AVX Corporation", Operating Temperature="-55°C ~ 125°C", Supplier Part Number 1=478-7939-1-ND, Temperature Coefficient=X7R, Tolerance=±10%, Voltage - Rated=10V, Applications="General Purpose", Capacitance=0.1µF, componentlink1description=Datasheet, componentlink1url=http://datasheets.avx.com/X7RDielectric.pdf, componentlink2description="DigiKey Link", componentlink2url=http://digikey.com/product-detail/en/avx-corporation/0603ZC104KAT2A/478-7939-1-ND/3881562, lastupdated="2020-09-02 1:03:32 AM", Lifecycle Status=Active, Minimum Order=1, Mounting Type="Surface Mount, MLCC", Package / Case="0603 (1608 Metric)", Packaging=TapeAndReel, Part Number=0603ZC104KAT2A, Part Status=Active, partid=4385, price=0.02, Series=-, Size / Dimension="0.063\" L x 0.032\" W (1.60mm x 0.81mm)", Supplier 1=DigiKey, Thickness (Max)="0.035\" (0.90mm)"
C13: library part CC0603KRX7R6BB104, "CAP CER 0.1UF 10V X7R 0603", Device Package="0603 (1608 Metric)", manufacturer=Yageo, Operating Temperature="-55°C ~ 125°C", Supplier Part Number 1=311-4055-1-ND, Temperature Coefficient=X7R, Tolerance=±10%, Voltage - Rated=10V, Applications="General Purpose", Capacitance="0.1 µF", componentlink1description=Datasheet, componentlink1url=https://www.yageo.com/upload/media/product/productsearch/datasheet/mlcc/UPY-GPHC_X7R_6.3V-to-50V_18.pdf, componentlink2description="DigiKey Link", componentlink2url=https://www.digikey.com/en/products/detail/yageo/CC0603KRX7R6BB104/5883741, lastupdated="2022-06-16 10:37:45 AM", Lifecycle Status=Active, Minimum Order=1, Mounting Type="Surface Mount, MLCC", Package / Case="0603 (1608 Metric)", Packaging=TapeAndReel, Part Number=CC0603KRX7R6BB104, Part Status=Active, partid=7937, price=0.01, Series=CC, Size / Dimension="0.063\" L x 0.031\" W (1.60mm x 0.80mm)", Supplier 1=DigiKey, Thickness (Max)="0.035\" (0.90mm)"
C18 C19 C22 C23 C30 C31: library part C0603C105K9RACAUTO, "CAP CER 0603 1UF 6.3V X7R 10%", Device Package="0603 (1608 Metric)", manufacturer=KEMET, Operating Temperature="-55°C ~ 125°C", Ratings=AEC-Q200, Supplier Part Number 1=399-17706-1-ND, Temperature Coefficient=X7R, Tolerance=±10%, Voltage - Rated=6.3V, Applications="Automotive, Bypass, Decoupling", Capacitance="1 µF", componentlink1description=Datasheet, componentlink1url=https://api.kemet.com/component-edge/download/datasheet/C0603C105K9RACAUTO.pdf, componentlink2description="DigiKey Link", componentlink2url=https://www.digikey.com/en/products/detail/kemet/C0603C105K9RACAUTO/8635833, lastupdated="2022-06-14 8:57:36 PM", Lifecycle Status=Active, Minimum Order=1, Mounting Type="Surface Mount, MLCC", Package / Case="0603 (1608 Metric)", Packaging=TapeAndReel, Part Number=C0603C105K9RACAUTO, Part Status=Active, partid=44737, price=0.04, Series="SMD Auto X7R", Size / Dimension="0.063\" L x 0.031\" W (1.60mm x 0.80mm)", Supplier 1=DigiKey, Thickness (Max)="0.037\" (0.95mm)"
C21: "CAP CER 10UF 10V X5R 0603", Capacitance="10 µF", Device Package="0603 (1608 Metric)", manufacturer=Yageo, Operating Temperature="-55°C ~ 85°C", Supplier Part Number 1=311-1782-1-ND, Temperature Coefficient=X5R, Tolerance=±10%, Voltage - Rated=10V, Applications="General Purpose", componentlink1description=Datasheet, componentlink1url=https://www.yageo.com/upload/media/product/productsearch/datasheet/mlcc/UPY-GPHC_X5R_4V-to-50V_25.pdf, componentlink2description="DigiKey Link", componentlink2url=https://www.digikey.com/en/products/detail/yageo/CC0603KRX5R6BB106/5195191, lastupdated="2022-06-17 3:32:34 AM", Lifecycle Status=Active, Minimum Order=1, Mounting Type="Surface Mount, MLCC", Package / Case="0603 (1608 Metric)", Packaging=TapeAndReel, Part Number=CC0603KRX5R6BB106, Part Status=Active, partid=40061, price=0.03, Series=CC, Size / Dimension="0.063\" L x 0.031\" W (1.60mm x 0.80mm)", Supplier 1=DigiKey, Thickness (Max)="0.035\" (0.90mm)"
C24 C25 C26 C27 C28 C29 C34 C36 C38 C49 C51 C53: library part GRM188R60J226MEA0D, "CAP CER 22UF 6.3V X5R 0603", Device Package="0603 (1608 Metric)", manufacturer="Murata Electronics", Operating Temperature="-55°C ~ 85°C", Supplier Part Number 1=490-7611-1-ND, Temperature Coefficient=X5R, Tolerance=±20%, Voltage - Rated=6.3V, Applications="General Purpose", Capacitance="22 µF", componentlink1description=Datasheet, componentlink1url=https://www.murata.com/~/media/webrenewal/support/library/catalog/products/capacitor/mlcc/c02e.ashx?la=en-us, componentlink2description="DigiKey Link", componentlink2url=https://www.digikey.com/en/products/detail/murata-electronics/GRM188R60J226MEA0D/4280542, lastupdated="2022-06-14 8:57:36 PM", Lifecycle Status=Active, Minimum Order=1, Mounting Type="Surface Mount, MLCC", Package / Case="0603 (1608 Metric)", Packaging=TapeAndReel, Part Number=GRM188R60J226MEA0D, Part Status=Active, partid=17945, price=0.03, Series=GRM, Size / Dimension="0.063\" L x 0.031\" W (1.60mm x 0.80mm)", Supplier 1=DigiKey, Thickness (Max)="0.039\" (1.00mm)"
C32: library part EMK107ABJ225KAHT, "CAP CER 2.2UF 16V X5R 0603", Device Package="0603 (1608 Metric)", manufacturer="Taiyo Yuden", Operating Temperature="-55°C ~ 85°C", Ratings=AEC-Q200, Supplier Part Number 1=587-3304-1-ND, Temperature Coefficient=X5R, Tolerance=±10%, Voltage - Rated=16V, Applications=Automotive, Capacitance="2.2 µF", componentlink1description=Datasheet, componentlink1url=https://www.yuden.co.jp/productdata/catalog//mlcc11_hq_e.pdf, componentlink2description="DigiKey Link", componentlink2url=https://www.digikey.com/en/products/detail/taiyo-yuden/EMK107ABJ225KAHT/4157314, lastupdated="2022-06-17 3:33:08 AM", Lifecycle Status=Active, Minimum Order=1, Mounting Type="Surface Mount, MLCC", Package / Case="0603 (1608 Metric)", Packaging=TapeAndReel, Part Number=EMK107ABJ225KAHT, Part Status=Active, partid=39154, price=0.04, Series=M, Size / Dimension="0.063\" L x 0.031\" W (1.60mm x 0.80mm)", Supplier 1=DigiKey, Thickness (Max)="0.035\" (0.90mm)"
D1: library part CMP-1055-00471-1, "Schottky Barrier Diode, 2-Pin SOD-323, Pb-Free, Tape and Reel", manufacturer="On Semiconductor", componentlink1description="Manufacturer URL", componentlink1url=http://www.onsemi.com/, componentlink2description=Datasheet, componentlink2url=http://www.onsemi.cn/pub_link/Collateral/NSR1020MW2T1-D.PDF, ComponentLink3Description="Package Specification", ComponentLink3URL=http://www.onsemi.com/pub_link/Collateral/477-02.PDF.1, Configuration=Single, DatasheetVersion="Rev. 1", IFSM Max (A)=5, Mounting Technology="Surface Mount", PackageDescription="2-Pin SOD, Body 1.7 x 1.25 mm", PackageReference=SOD-323-2-477-02, PackageVersion="Rev. H, 03/2007", Packing="Tape and Reel", PartNumber=NSR1020MW2T1G, RoHS=TRUE
IC1: "SDRAM - Mobile LPDDR3 Memory IC 4Gb (128M x 32) Parallel 933MHz 178-VFBGA (11x11.5)", Package="VFBGA-178 Winbond Electronics", Availability="Not in stock", Check_prices=https://www.snapeda.com/parts/W63CH2MBVACE/Winbond%20Electronics/view-part/4785003/?ref=eda, MF="Winbond Electronics", MP=W63CH2MBVACE, price=None, SnapEDA_Link=https://www.snapeda.com/parts/W63CH2MBVACE/Winbond%20Electronics/view-part/4785003/?ref=snap
J1: "CONN USB 3.1 TYPE C PLUG UNIT", Current Rating (Amps)="0.25A, 1.25A", manufacturer="Hirose Electric Co Ltd", Operating Temperature="-30°C ~ 85°C", Supplier Part Number 1=H126317-ND, Voltage - Rated=20VAC, componentlink1description=Datasheet, componentlink1url=https://www.hirose.com/product/document?clcode=CL0480-0522-0-00&productname=CX60-SLDA&series=CX&documenttype=Catalog&lang=en&documentid=D52488_en, componentlink2description="DigiKey Link", componentlink2url=http://digikey.com/product-detail/en/hirose-electric-co-ltd/CX60-24S-UNIT/H126317-ND/8561505, Connector Type="USB - C (Type - C)", Gender=Plug, lastupdated="2020-05-24 10:16:49 PM", Lifecycle Status=Active, Mating Cycles=10000, Minimum Order=1, Mounting Feature=Horizontal, Mounting Type="Board Edge, Straddle Mount", Number of Contacts=24, Number of Ports=1, Packaging=Tray, Part Number=CX60-24S-UNIT, Part Status=Active, price=1.86, Series=CX, Shielding=Shielded, Specifications="USB 3.1 (USB 3.1 Gen 2, Superspeed+)", Supplier 1=DigiKey, Termination=Solder
J2: "Connector", Manufacturer_Name=Panasonic, Mouser Part Number=769-AXG830044, Datasheet Link=https://www.mouser.com/datasheet/2/315/con_eng_a35us-1299378.pdf, Height=0.66mm, Manufacturer_Part_Number=AXG830044, Mouser Price/Stock=https://www.mouser.com/Search/Refine.aspx?Keyword=769-AXG830044
J3: library part CMP-2000-06166-2, "CONN MICRO SD CARD PUSH-PULL", Contact Resistance=100mR, Current Rating=500mA, Flammability Rating="UL94 V-0", Insulation Resistance=1GR, Max Operating Temperature=85°C, Max Voltage Rating (AC)=125V, Min Operating Temperature=-25°C, Package Quantity=1, Connector Type=Connector, Contact Material="Copper Alloy", Contact Plating=Gold, Depth=11.45mm, Gender=Female, Housing Material=Polymer, Lead Free="Lead Free", Length=11.95mm, Max Current Rating=500mA, Mount="Surface Mount", Number of Contacts=8, Number of Rows=1, Orientation="Right Angle", Packaging="Tape and Reel", Pitch=1.1mm, Radiation Hardening=No, REACH SVHC="No SVHC", Termination=Solder, Voltage Rating (AC)=125V, Width=11.95mm
L2 L3 L4: library part MPI2010V1-1R5-R, "FIXED IND 1.5UH 2.4A 99MOHM SMD", Current - Saturation=3.2A, Current Rating (Amps)="2.4 A", DC Resistance (DCR)="99mOhm Max", Device Package="0806 (2016 Metric)", Frequency - Self Resonant=85MHz, Inductance Frequency - Test="1 MHz", manufacturer="Eaton - Electronics Division", Operating Temperature="-40°C ~ 125°C", Supplier Device Package=2010, Supplier Part Number 1=283-MPI2010V1-1R5-RCT-ND, Tolerance=±20%, componentlink1description=Datasheet, componentlink1url=https://www.eaton.com/content/dam/eaton/products/electronic-components/resources/data-sheet/eaton-mpi20-v1-miniature-power-inductors-data-sheet.pdf, componentlink2description="DigiKey Link", componentlink2url=https://www.digikey.com/en/products/detail/eaton-electronics-division/MPI2010V1-1R5-R/11565372, Height - Seated (Max)="0.039\" (1.00mm)", Inductance="1.5 µH", lastupdated="2022-05-23 1:46:25 PM", Lifecycle Status=Active, Minimum Order=1, Mounting Type="Surface Mount", Package / Case="0806 (2016 Metric)", Packaging=TapeAndReel, Part Number=MPI2010V1-1R5-R, Part Status=Active, partid=3747, price=0.14, Series=MPI20-V1, Shielding=Shielded, Size / Dimension="0.079\" L x 0.063\" W (2.00mm x 1.60mm)", Supplier 1=DigiKey
MD?: library part CMP-06331-000014-1, "WIRELESS MODULE", manufacturer=Microchip, Max Frequency=2472MHz, Max Junction Temp=+125°C, Max Supply Voltage=4.2V, Min Supply Voltage=2.7V, Package=SMT_MODULE, Receiving Current=87mA, Temperature="-40°C to +85°C", Temperature Range High=+85°C, Temperature Range Low=-40°C, Transmitting Current=256mA, Automotive=No, Bandwidth=60MHz, Category=UNK, componentlink2description=Datasheet, componentlink2url=http://ww1.microchip.com/downloads/en/DeviceDoc/IEEE-802.11-bgn-Network-Controller-with-Integrated-Bluetooth-Low-Energy-Module-Data-Sheet-DS70005350B.pdf, Data Rate=72.2Mbits/s, Device Class L1="Integrated Circuits (ICs)", Device Class L2="RF Semiconductors and Devices", Device Class L3=Transceivers, Digikey Description="WIRELESS MODULE", Height=2.087mm, Interface=I2C,SPI,UART, Lead Free=Yes, Manufacturer Part Number=ATWINC3400-MR210CA122, Mouser Description="WLAN+BTCombo Module IEEE 802.11b/g/n Bluetooth v4.0(BLE) Class I/Class II 36-Pin", Number Of Gpio=21, Octopart=https://octopart.com/atwinc3400-mr210ca122-microchip-87693673, RoHS=TRUE, Sensitivity=-90dBm
P1: "Header, 2-Pin", LatestRevisionDate=17-Jul-2002, LatestRevisionNote="Re-released for DXP Platform.", Publisher="Altium Limited"
R1: library part ERJ-3GEYJ104V, "RES SMD 100K OHM 5% 1/10W 0603", Device Package="0603 (1608 Metric)", manufacturer="Panasonic Electronic Components", Operating Temperature="-55°C ~ 155°C", Power (Watts)="0.1W, 1/10W", Ratings=AEC-Q200, Supplier Device Package=0603, Supplier Part Number 1=P100KGCT-ND, Temperature Coefficient=±200ppm/°C, Tolerance=±5%, componentlink1description=Datasheet, componentlink1url=http://industrial.panasonic.com/www-cgi/jvcr13pz.cgi?E+PZ+3+AOA0001+ERJ3GEYJ104V+7+WW, componentlink2description="DigiKey Link", componentlink2url=https://www.digikey.com/en/products/detail/panasonic-electronic-components/ERJ-3GEYJ104V/135832, Composition="Thick Film", Features="Automotive AEC-Q200", Height - Seated (Max)="0.022\" (0.55mm)", lastupdated="2022-06-16 10:57:13 AM", Lifecycle Status=Active, Minimum Order=1, Number of Terminations=2, Package / Case="0603 (1608 Metric)", Packaging=TapeAndReel, Part Number=ERJ-3GEYJ104V, Part Status=Active, partid=24645, price=0.01, Resistance="100 kOhms", Series=ERJ-3G, Size / Dimension="0.063\" L x 0.031\" W (1.60mm x 0.80mm)", Supplier 1=DigiKey
R2: library part RR0816P-5761-D-74H, "RES SMD 5.76KOHM 0.5% 1/16W 0603", Device Package="0603 (1608 Metric)", manufacturer=Susumu, Operating Temperature="-55°C ~ 125°C", Power (Watts)="0.063W, 1/16W", Supplier Device Package=0603, Supplier Part Number 1=RR08P5.76KDCT-ND, Temperature Coefficient=±25ppm/°C, Tolerance=±0.5%, componentlink1description=Datasheet, componentlink1url=http://www.susumu.co.jp/common/pdf/n_catalog_partition05_en.pdf, componentlink2description="DigiKey Link", componentlink2url=https://www.digikey.com/en/products/detail/susumu/RR0816P-5761-D-74H/1250278, Composition="Thin Film", Height - Seated (Max)="0.020\" (0.50mm)", lastupdated="2022-06-17 3:53:54 AM", Lifecycle Status=Active, Minimum Order=1, Number of Terminations=2, Package / Case="0603 (1608 Metric)", Packaging=TapeAndReel, Part Number=RR0816P-5761-D-74H, Part Status=Active, partid=20569, price=0.01, Resistance="5.76 kOhms", Series=RR, Size / Dimension="0.063\" L x 0.031\" W (1.60mm x 0.80mm)", Supplier 1=DigiKey
R3 R4: library part AC0603FR-075K11L, "RES SMD 5.11K OHM 1% 1/10W 0603", Device Package="0603 (1608 Metric)", manufacturer=Yageo, Operating Temperature="-55°C ~ 155°C", Power (Watts)="0.1W, 1/10W", Ratings=AEC-Q200, Supplier Device Package=0603, Supplier Part Number 1=YAG3620CT-ND, Temperature Coefficient=±100ppm/°C, Tolerance=±1%, componentlink1description=Datasheet, componentlink1url=https://www.yageo.com/upload/media/product/productsearch/datasheet/rchip/PYu-AC_51_RoHS_L_7.pdf, componentlink2description="DigiKey Link", componentlink2url=https://www.digikey.com/en/products/detail/yageo/AC0603FR-075K11L/5896208, Composition="Thick Film", Features="Automotive AEC-Q200, Moisture Resistant", Height - Seated (Max)="0.022\" (0.55mm)", lastupdated="2022-07-10 9:21:20 AM", Lifecycle Status=Active, Minimum Order=1, Number of Terminations=2, Package / Case="0603 (1608 Metric)", Packaging=CutTape, Part Number=AC0603FR-075K11L, Part Status=Active, partid=23743, price=0.01, Resistance="5.11 kOhms", Series=AC, Size / Dimension="0.063\" L x 0.031\" W (1.60mm x 0.80mm)", Supplier 1=DigiKey
R5 R6 R7 R8: library part CRGH0603J10K, "RES SMD 10K OHM 5% 1/5W 0603", Device Package="0603 (1608 Metric)", manufacturer="TE Connectivity Passive Product", Operating Temperature="-55°C ~ 155°C", Power (Watts)="0.2W, 1/5W", Supplier Device Package=0603, Supplier Part Number 1=A126394CT-ND, Temperature Coefficient=±100ppm/°C, Tolerance=±5%, componentlink1description=Datasheet, componentlink1url=https://www.te.com/commerce/DocumentDelivery/DDEController?Action=srchrtrv&DocNm=1773204-1&DocType=DS&DocLang=English, componentlink2description="DigiKey Link", componentlink2url=https://www.digikey.com/en/products/detail/te-connectivity-passive-product/CRGH0603J10K/2385379, Composition="Thick Film", lastupdated="2022-07-10 9:21:30 AM", Lifecycle Status=Active, Minimum Order=1, Number of Terminations=2, Package / Case="0603 (1608 Metric)", Packaging=TapeAndReel, Part Number=CRGH0603J10K, Part Status=Active, partid=22457, price=0.01, Resistance="10 kOhms", Series="CRGH, Neohm", Size / Dimension="0.063\" L x 0.031\" W (1.60mm x 0.80mm)", Supplier 1=DigiKey
R9 R10: library part ESR03EZPF1001, "RES SMD 1K OHM 1% 1/4W 0603", Device Package="0603 (1608 Metric)", manufacturer="Rohm Semiconductor", Operating Temperature="-55°C ~ 155°C", Power (Watts)="0.25W, 1/4W", Ratings=AEC-Q200, Supplier Device Package=0603, Supplier Part Number 1=RHM1.00KADCT-ND, Temperature Coefficient=±100ppm/°C, Tolerance=±1%, componentlink1description=Datasheet, componentlink1url=https://www.rohm.com/datasheet/ESR01MZPF/esr-e, componentlink2description="DigiKey Link", componentlink2url=https://www.digikey.com/en/products/detail/rohm-semiconductor/ESR03EZPF1001/1983428, Composition="Thick Film", Features="Automotive AEC-Q200, Pulse Withstanding", Height - Seated (Max)="0.022\" (0.55mm)", lastupdated="2022-07-15 11:50:24 AM", Lifecycle Status=Active, Minimum Order=1, Number of Terminations=2, Package / Case="0603 (1608 Metric)", Packaging=TapeAndReel, Part Number=ESR03EZPF1001, Part Status=Active, partid=5469, price=0.01, Resistance="1 kOhms", Series=ESR, Size / Dimension="0.063\" L x 0.031\" W (1.60mm x 0.80mm)", Supplier 1=DigiKey
R11: library part ERJ-3EKF2400V, "RES SMD 240 OHM 1% 1/10W 0603", Device Package="0603 (1608 Metric)", manufacturer="Panasonic Electronic Components", Operating Temperature="-55°C ~ 155°C", Power (Watts)="0.1W, 1/10W", Ratings=AEC-Q200, Supplier Device Package=0603, Supplier Part Number 1=P240HCT-ND, Temperature Coefficient=±100ppm/°C, Tolerance=±1%, componentlink1description=Datasheet, componentlink1url=https://industrial.panasonic.com/cdbs/www-data/pdf/RDA0000/AOA0000C304.pdf, componentlink2description="DigiKey Link", componentlink2url=https://www.digikey.com/en/products/detail/panasonic-electronic-components/ERJ-3EKF2400V/1746342, Composition="Thick Film", Features="Automotive AEC-Q200", Height - Seated (Max)="0.022\" (0.55mm)", lastupdated="2022-07-15 11:49:17 AM", Lifecycle Status=Active, Minimum Order=1, Number of Terminations=2, Package / Case="0603 (1608 Metric)", Packaging=TapeAndReel, Part Number=ERJ-3EKF2400V, Part Status=Active, partid=23069, price=0.01, Resistance="240 Ohms", Series=ERJ-3EK, Size / Dimension="0.063\" L x 0.031\" W (1.60mm x 0.80mm)", Supplier 1=DigiKey
U1: "Integrated Circuit", Manufacturer_Name=NXP, Mouser Part Number=771-MCIMX7D7DVK10SD, Datasheet Link=https://www.nxp.com/docs/en/data-sheet/IMX7DCEC.pdf, Height=1.1mm, Manufacturer_Part_Number=MCIMX7D7DVK10SD, Mouser Price/Stock=https://www.mouser.co.uk/ProductDetail/NXP-Semiconductors/MCIMX7D7DVK10SD?qs=HXFqYaX1Q2wSzmbkM61K9A%3D%3D
U2: library part MC34PF3001A3EP, "Integrated Circuit", Manufacturer_Name=NXP, Mouser Part Number=841-MC34PF3001A3EP, Arrow Part Number=MC34PF3001A3EP, Arrow Price/Stock=https://www.arrow.com/en/products/mc34pf3001a3ep/nxp-semiconductors, Datasheet Link=http://www.nxp.com/docs/en/data-sheet/PF3001.pdf, Height=0.9mm, Manufacturer_Part_Number=MC34PF3001A3EP, Mouser Price/Stock=https://www.mouser.co.uk/ProductDetail/NXP-Semiconductors/MC34PF3001A3EP?qs=xufs61hA5Mal91rmTUKkCQ%3D%3D
U3: library part CMP-10137-000002-1, "IC BATT CHG LI-ION 1CELL 8UDFN", Battery Pack Voltage=4.2V, Max Charge Current=600mA, Max Operating Temperature=85°C, Max Supply Voltage=10V, Min Operating Temperature=-40°C, Fault Protection="Over Voltage", Mount="Surface Mount", Number of Cells=1, Number of Pins=8, Output Voltage=4.2V, Packaging=Rail/Tube, Radiation Hardening=No, RoHS Compliant=Yes, Series=-

## Nets (pads, with @x,y where several pads share a name; then routed paths per layer and width w, separated by ;. In a path a pad name is that pad's centre, name@x,y a point inside that pad or via, vN(x,y) a via of type N, cw(c..) or ccw(c..) an arc to the next point about the centre after c; other vN are vias at no path point)
BOOT_MODE0: C1.2 C2.2 C3.2 C4.2 C5.1 C6.2 C7.1 C8.1 C9.1 C10.1 C11.1 C12.1 C13.1 C14.1 C15.1 C16.1 C17.1 C18.2 C19.2 C20.2 C21.2 C22.1 C23.1 C24.2 C25.2 C26.2 C27.2 C28.2 C29.2 C30.1 C31.1 C32.1 C33.1 C34.2 C35.1 C36.2 C37.1 C38.2 C39.1 C40.1 C41.1 C42.1 C43.1 C44.1 C45.1 C46.1 C47.1 C48.1 C49.2 C50.1 C51.2 C52.1 C53.2 C54.1 IC1.B2 IC1.B5 IC1.B6 IC1.B12 IC1.C3 IC1.C5 IC1.C6 IC1.D3 IC1.D12 IC1.E4 IC1.E5 IC1.E6 IC1.F4 IC1.F5 IC1.F6 IC1.F12 IC1.G3 IC1.G4 IC1.G6 IC1.G9 IC1.H2 IC1.H10 IC1.J4 IC1.J12 IC1.K2 IC1.K10 IC1.L6 IC1.L9 IC1.M4 IC1.M5 IC1.M6 IC1.M12 IC1.N4 IC1.N5 IC1.N6 IC1.P3 IC1.P12 IC1.R4 IC1.R5 IC1.R6 IC1.T2 IC1.T3 IC1.T4 IC1.T5 IC1.T6 IC1.T12 J1.A1 J1.A12 J1.B1 J1.B12 J1.S J2.2 J2.3 J2.8 J2.14 J2.17 J2.23 J2.26 J2.MP3 J2.MP4 J3.6 J3.11 J3.12 J3.13 J3.14 P1.1 R2.2 R3.2 R4.2 R10.1 R11.1 U1.A1 U1.A28 U1.AA4 U1.AA6 U1.AA23 U1.AA25 U1.AC8 U1.AC10 U1.AC12 U1.AC14 U1.AC15 U1.AC17 U1.AC21 U1.AD3 U1.AD5 U1.AD6 U1.AD24 U1.AD26 U1.AE6 U1.AE7 U1.AE8 U1.AE9 U1.AE17 U1.AE21 U1.AF3 U1.AF5 U1.AF8 U1.AF9 U1.AF10 U1.AF11 U1.AF13 U1.AF14 U1.AF15 U1.AF24 U1.AF26 U1.AG10 U1.AH1 U1.AH28 U1.B5 U1.B23 U1.B26 U1.C3 U1.C5 U1.C7 U1.C10 U1.C13 U1.C14 U1.C15 U1.C23 U1.C24 U1.C25 U1.C26 U1.D8 U1.D12 U1.D17 U1.D21 U1.E3 U1.E5 U1.E24 U1.E26 U1.F8 U1.F10 U1.F12 U1.F14 U1.F15 U1.F17 U1.F21 U1.H4 U1.H6 U1.H23 U1.H25 U1.L13 U1.L16 U1.M4 U1.M6 U1.M23 U1.M25 U1.N11 U1.N18 U1.T11 U1.T18 U1.U4 U1.U6 U1.U23 U1.U25 U1.U26 U1.V13 U1.V16 U1.W3 U1.W6 U1.Y1 U2.4 U2.5 U2.12 U2.24 U2.26 U2.31 U2.39 U2.40 U2.49 U3.4 U3.5 U3.9
BOOT_MODE1: C16.2 J2.15 J2.MP1 J2.MP2 U1.Y2 U1.Y9 U1.Y11 U2.20
BT_CFG04: C6.1 C13.2 C46.2 R5.2 R6.2 R7.2 R8.2 U1.D22 U1.F27 U1.P9 U1.R9 U2.32 U2.47
DDR_VREF: C52.2 C53.1 C54.2 IC1.H4 IC1.J11 R9.1 R10.2 U1.T20
DRAM0_ZQ: IC1.B3 R11.2
DRAM_ADDR0: IC1.R2 U1.AC24
DRAM_ADDR1: IC1.P2 U1.AC25
DRAM_ADDR2: IC1.N2 U1.AC26
DRAM_ADDR3: IC1.N3 U1.AB25
DRAM_ADDR4: IC1.M3 U1.AB24
DRAM_ADDR5: IC1.F3 U1.AE23
DRAM_ADDR6: IC1.E3 U1.AF23
DRAM_ADDR7: IC1.E2 U1.AE22
DRAM_ADDR8: IC1.D2 U1.AD22
DRAM_ADDR9: IC1.C2 U1.AC22
DRAM_CS0_B: IC1.L3 U1.AE26
DRAM_DATA0: IC1.P9 U1.AH22
DRAM_DATA1: IC1.N9 U1.AG19
DRAM_DATA2: IC1.N10 U1.AG20
DRAM_DATA3: IC1.N11 U1.AF22
DRAM_DATA4: IC1.M8 U1.AF20
DRAM_DATA5: IC1.M9 U1.AG22
DRAM_DATA6: IC1.M10 U1.AF21
DRAM_DATA7: IC1.M11 U1.AH20
DRAM_DATA8: IC1.F11 U1.AC18
DRAM_DATA9: IC1.F10 U1.AB18
DRAM_DATA10: IC1.F9 U1.AD16
DRAM_DATA11: IC1.F8 U1.AC16
DRAM_DATA12: IC1.E11 U1.AD18
DRAM_DATA13: IC1.E10 U1.AE18
DRAM_DATA14: IC1.E9 U1.AB16
DRAM_DATA15: IC1.D9 U1.AE16
DRAM_DATA16: IC1.T8 U1.W27
DRAM_DATA17: IC1.T9 U1.Y27
DRAM_DATA18: IC1.T10 U1.Y26
DRAM_DATA19: IC1.T11 U1.Y28
DRAM_DATA20: IC1.R8 U1.AA26
DRAM_DATA21: IC1.R9 U1.AB26
DRAM_DATA22: IC1.R10 U1.AB27
DRAM_DATA23: IC1.R11 U1.AB28
DRAM_DATA24: IC1.C11 U1.V23
DRAM_DATA25: IC1.C10 U1.V22
DRAM_DATA26: IC1.C9 U1.T23
DRAM_DATA27: IC1.C8 U1.T22
DRAM_DATA28: IC1.B11 U1.V24
DRAM_DATA29: IC1.B10 U1.V25
DRAM_DATA30: IC1.B9 U1.T25
DRAM_DATA31: IC1.B8 U1.T24
DRAM_DQM0: IC1.L8 U1.AH24
DRAM_DQM1: IC1.G8 U1.AD20
DRAM_DQM2: IC1.P8 U1.AD28
DRAM_DQM3: IC1.D8 U1.Y25
DRAM_ODT0: IC1.J8 U1.AF16
DRAM_SDCKE0: IC1.K3 U1.Y22
DRAM_SDCLK0_N: IC1.J2 U1.AF25
DRAM_SDCLK0_P: IC1.J3 U1.AE25
DRAM_SDQS0_N: IC1.L11 U1.AG23
DRAM_SDQS0_P: IC1.L10 U1.AG24
DRAM_SDQS1_N: IC1.G11 U1.AC20
DRAM_SDQS1_P: IC1.G10 U1.AB20
DRAM_SDQS2_N: IC1.P11 U1.AD27
DRAM_SDQS2_P: IC1.P10 U1.AC27
DRAM_SDQS3_N: IC1.D11 U1.Y24
DRAM_SDQS3_P: IC1.D10 U1.Y23
I2C1_SCL: R5.1 U1.N4 U2.46
I2C1_SDA: R6.1 U1.N5 U2.45
LCD_RST: J2.19 U1.Y4
LCD_TE: J2.21 U1.Y5
MIPI_CLK_N: J2.10 U1.B24
MIPI_CLK_P: J2.12 U1.A24
MIPI_D0_N: J2.4 U1.B25
MIPI_D0_P: J2.6 U1.A25
MIPI_VREG_0P4V: C44.2 U1.B19
NetC3_1: C3.1 U2.36
NetC18_1: C18.1 U2.41
NetC19_1: C19.1 U2.43
NetC20_1: C20.1 U2.44
NetIC1_A1: IC1.A1 IC1.A2 IC1.A12 IC1.A13 IC1.B1 IC1.B13 IC1.T1 IC1.T13 IC1.U1 IC1.U2 IC1.U12 IC1.U13
NetJ1_A5: J1.A5 R3.1
NetJ1_B5: J1.B5 R4.1
NetL2_1: L2.1 U2.29
NetL3_2: L3.2 U2.8 U2.9
NetL4_2: L4.2 U2.17
NetR1_2: R1.2 U1.AE13 U2.48
NetR2_1: R2.1 U3.7
NetU1_AB3: U1.AB3 U2.2
NetU1_AB4: U1.AB4 U2.1
NetU1_Y3: U1.Y3 U2.3
NVCC_1V8: C22.2 C26.1 C27.1 C37.2 C38.1 IC1.A3 IC1.A4 IC1.A5 IC1.A6 IC1.A10 IC1.U3 IC1.U4 IC1.U5 IC1.U6 IC1.U10 J2.25 J2.27 L4.1 U1.AF4 U2.16 U2.19
NVCC_DRAM: C28.1 C29.1 C48.2 C49.1 C50.2 C51.1 IC1.A8 IC1.A9 IC1.A11 IC1.C12 IC1.D4 IC1.D5 IC1.D6 IC1.E8 IC1.E12 IC1.F2 IC1.G2 IC1.G5 IC1.G12 IC1.H3 IC1.H5 IC1.H6 IC1.H8 IC1.H9 IC1.H11 IC1.H12 IC1.J5 IC1.J6 IC1.J9 IC1.J10 IC1.K5 IC1.K6 IC1.K8 IC1.K11 IC1.K12 IC1.L2 IC1.L5 IC1.L12 IC1.M2 IC1.N8 IC1.N12 IC1.P4 IC1.P5 IC1.P6 IC1.R12 IC1.U8 IC1.U9 IC1.U11 L2.2 R9.2 U1.AA19 U1.AC19 U1.AF17 U1.AF18 U1.AF19 U1.V20 U1.V27 U1.V28 U1.W21 U1.W23 U1.W26 U1.Y20 U2.27
NVCC_SD1: C5.2 C45.2 J3.4 U1.J11 U2.33
PMIC_PWR: C7.2 C8.2 C9.2 C10.2 C11.2 C12.2 C21.1 C23.2 C30.2 C31.2 D1.1 J1.A4 J1.A9 J1.B4 J1.B9 U2.7 U2.10 U2.13 U2.18 U2.21 U2.28 U2.38 U3.1
PVCC_I2C_SPI_UART_CAP: C47.2 U1.W8
SD1_CD_B: J3.9 J3.10 U1.A5
SD1_CLK: J3.5 U1.B3
SD1_CMD: J3.3 U1.A2
SD1_DATA0: J3.7 U1.B4
SD1_DATA1: J3.8 U1.A4
SD1_DATA2: J3.1 U1.B2